# Altium PCB S36.pcbdoc
Units mm, origin at the board's own origin, x right, y up, seen from the top; angles counter-clockwise.
Board outline 99.01 x 72.4 mm, 2 copper layers (Top Layer, Bottom Layer); 7 components, 0 nets, 30 pads, 0 vias.
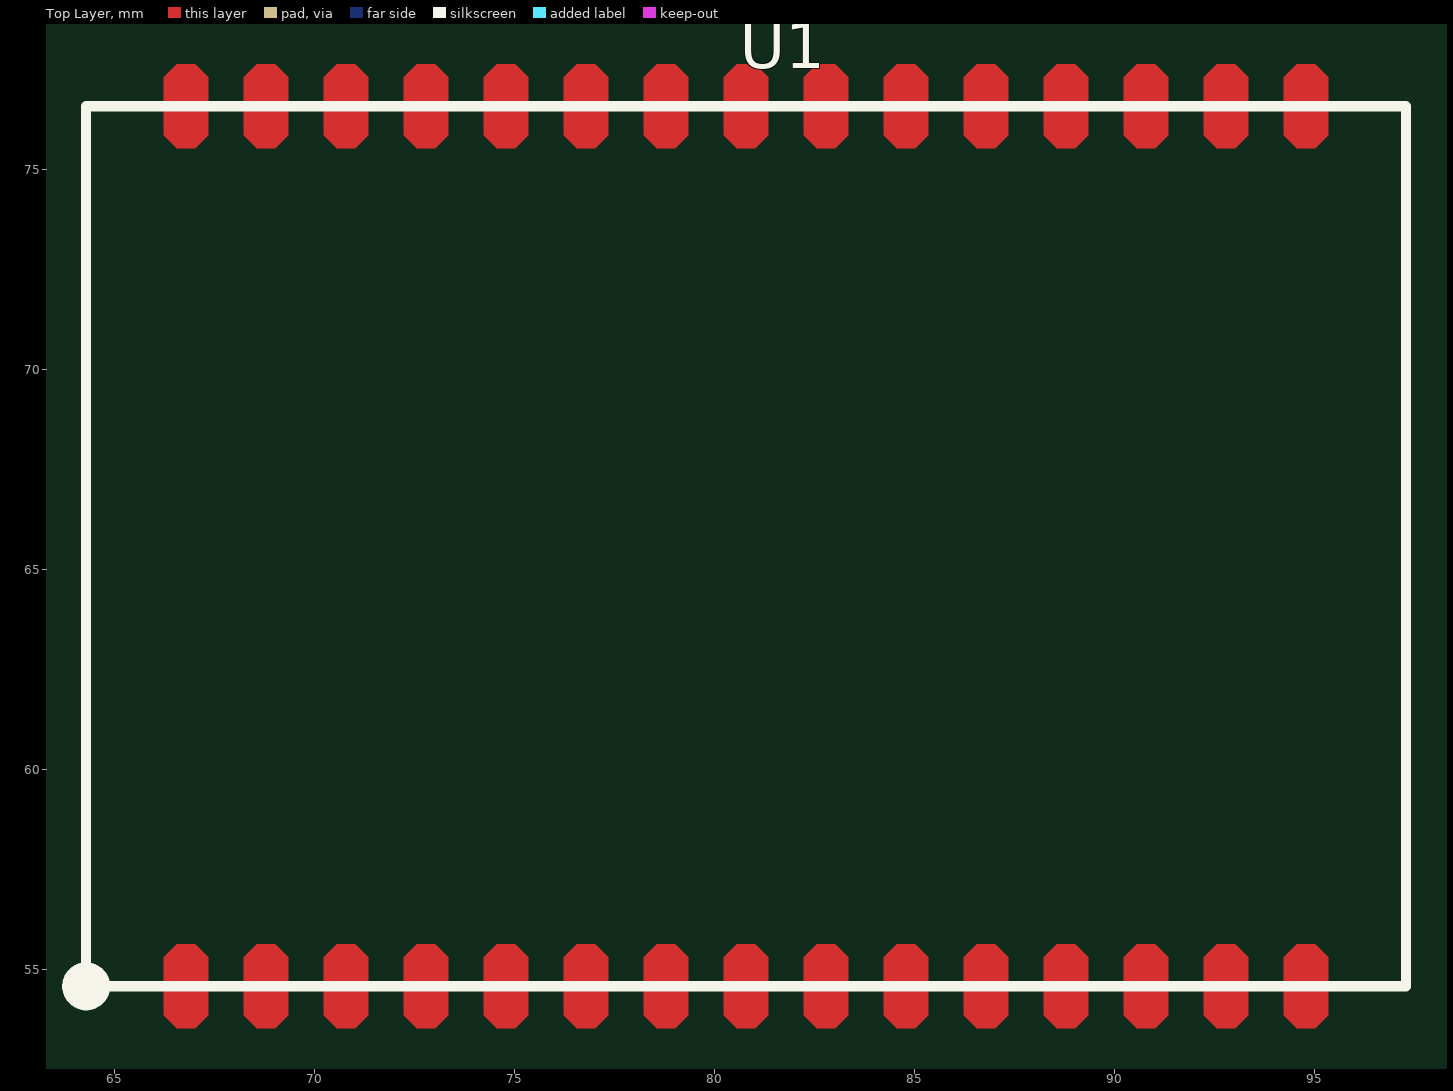
[diagram p0: Top Layer view]
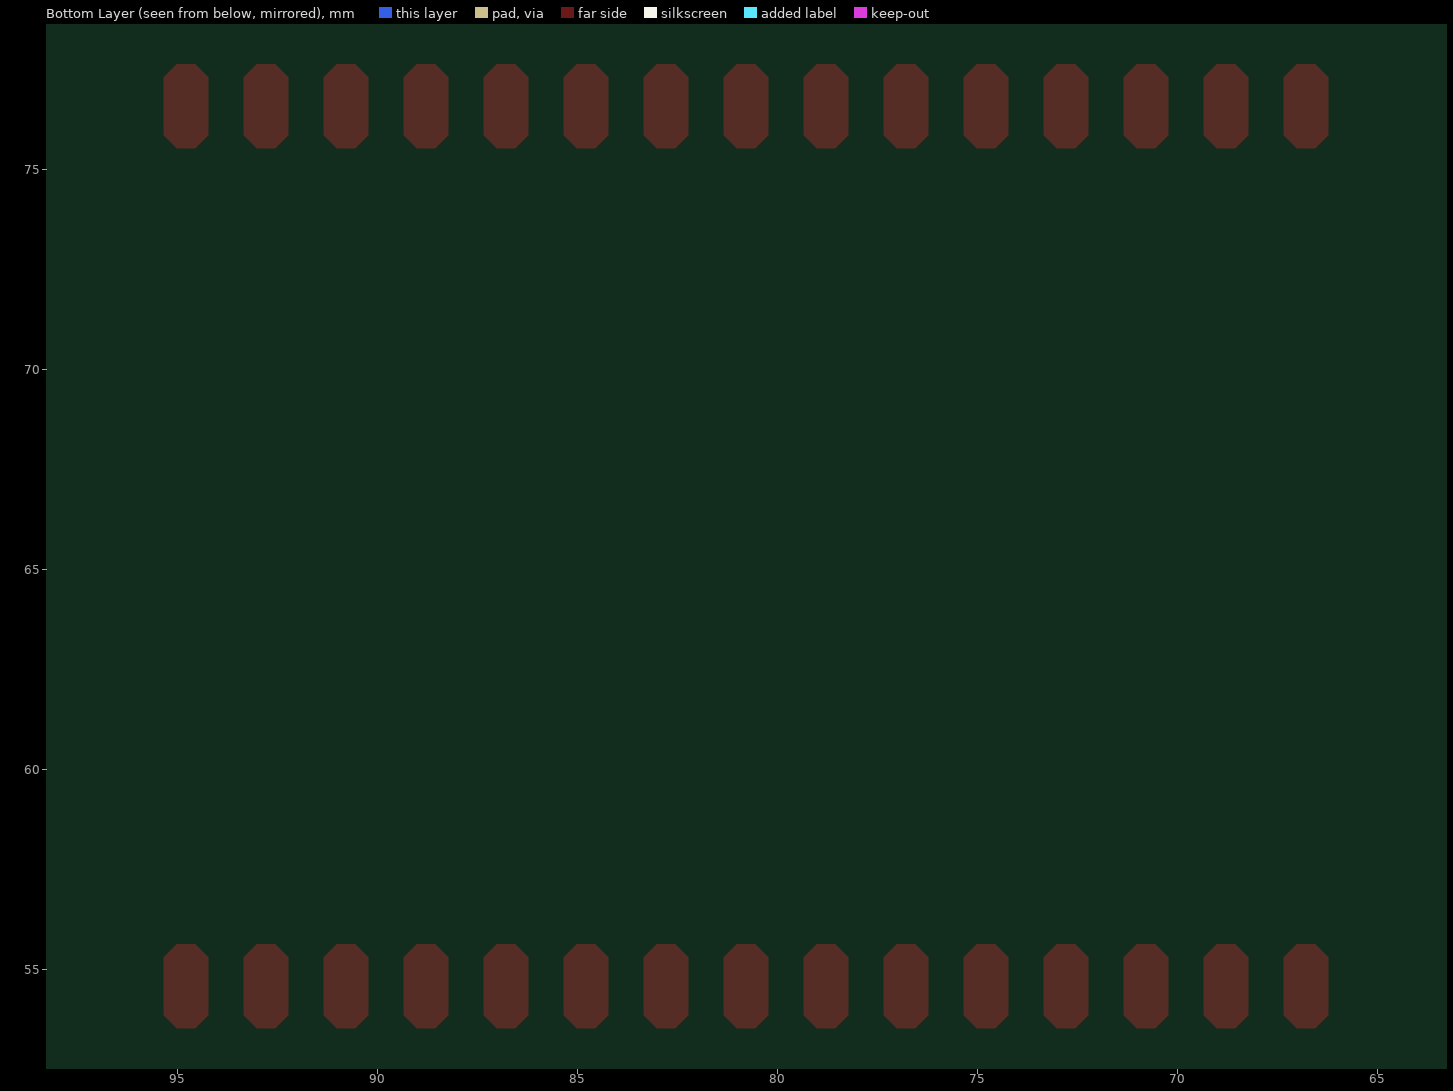
[diagram p1: Bottom Layer view, seen from below]

## Layer stack, top to bottom
Top Layer: signal copper (thickness not stored)
Dielectric: dielectric 0.32, FR-4, Dk 4.8
Bottom Layer: signal copper (thickness not stored)

## Board outline
124.406,25.4 25.4,25.4 25.4,97.798 124.406,97.798

## Components (designator, comment, footprint, x,y, rotation, side; value= is the part's Value field where it differs from the comment)
U1 "S36-PAD" S36-PAD 80.79,65.588 r0 top
? "" ? 79.29,78.868 r0 top
? "" ? 59.495,65.588 r0 top
? "" ? 92.59,49.419 r0 top
? "" ? 98.797,58.387 r0 top
? "" ? 103.373,74.813 r0 top
? "" ? 50.721,56.362 r0 top

## Footprints (in the part's own frame and the unit in brackets; to place one, negate y for a bottom-side part, rotate by r counter-clockwise, add the part's x,y. Pads: shape width x height; smd on the part's side, far side on the other; paste and mask are expansions set on the pad)
S36-PAD [mm]
  round 0 smd: 1(-14,-11) 2(-12,-11) 3(-10,-11) 4(-8,-11) 5(-6,-11) 6(-4,-11) 7(-2,-11) 8(0,-11) 9(2,-11) 10(4,-11) 11(6,-11) 12(8,-11) 13(10,-11) 14(12,-11) 15(14,-11) 16(14,11) 17(12,11) 18(10,11) 19(8,11) 20(6,11) 21(4,11) 22(2,11) 23(0,11) 24(-2,11) 25(-4,11) 26(-6,11) 27(-8,11) 28(-10,11) 29(-12,11) 30(-14,11)
  Top Layer region: 14.554,-11.73 14.229,-12.054 13.77,-12.054 13.446,-11.73 13.446,-10.27 13.77,-9.946 14.229,-9.946 14.554,-10.27
  Top Layer region: 12.554,-11.73 12.229,-12.054 11.77,-12.054 11.446,-11.73 11.446,-10.27 11.77,-9.946 12.229,-9.946 12.554,-10.27
  Top Layer region: 10.554,-11.73 10.229,-12.054 9.77,-12.054 9.446,-11.73 9.446,-10.27 9.77,-9.946 10.229,-9.946 10.554,-10.27
  Top Layer region: 8.554,-11.73 8.229,-12.054 7.77,-12.054 7.446,-11.73 7.446,-10.27 7.77,-9.946 8.229,-9.946 8.554,-10.27
  Top Layer region: 6.554,-11.73 6.23,-12.054 5.77,-12.054 5.446,-11.73 5.446,-10.27 5.77,-9.946 6.23,-9.946 6.554,-10.27
  Top Layer region: 4.554,-11.73 4.23,-12.054 3.77,-12.054 3.446,-11.73 3.446,-10.27 3.77,-9.946 4.23,-9.946 4.554,-10.27
  Top Layer region: 2.554,-11.73 2.229,-12.054 1.77,-12.054 1.446,-11.73 1.446,-10.27 1.77,-9.946 2.229,-9.946 2.554,-10.27
  Top Layer region: 0.554,-11.73 0.229,-12.054 -0.23,-12.054 -0.554,-11.73 -0.554,-10.27 -0.23,-9.946 0.229,-9.946 0.554,-10.27
  Top Layer region: -1.446,-11.73 -1.771,-12.054 -2.23,-12.054 -2.554,-11.73 -2.554,-10.27 -2.23,-9.946 -1.771,-9.946 -1.446,-10.27
  Top Layer region: -3.446,-11.73 -3.771,-12.054 -4.23,-12.054 -4.554,-11.73 -4.554,-10.27 -4.23,-9.946 -3.771,-9.946 -3.446,-10.27
  Top Layer region: -5.446,-11.73 -5.77,-12.054 -6.23,-12.054 -6.554,-11.73 -6.554,-10.27 -6.23,-9.946 -5.77,-9.946 -5.446,-10.27
  Top Layer region: -7.446,-11.73 -7.77,-12.054 -8.23,-12.054 -8.554,-11.73 -8.554,-10.27 -8.23,-9.946 -7.77,-9.946 -7.446,-10.27
  Top Layer region: -9.446,-11.73 -9.77,-12.054 -10.23,-12.054 -10.554,-11.73 -10.554,-10.27 -10.23,-9.946 -9.77,-9.946 -9.446,-10.27
  Top Layer region: -11.446,-11.73 -11.771,-12.054 -12.23,-12.054 -12.554,-11.73 -12.554,-10.27 -12.23,-9.946 -11.771,-9.946 -11.446,-10.27
  Top Layer region: -13.446,-11.73 -13.771,-12.054 -14.23,-12.054 -14.554,-11.73 -14.554,-10.27 -14.23,-9.946 -13.771,-9.946 -13.446,-10.27
  Top Layer region: 14.554,10.27 14.229,9.946 13.77,9.946 13.446,10.27 13.446,11.73 13.77,12.054 14.229,12.054 14.554,11.73
  Top Layer region: 12.554,10.27 12.229,9.946 11.77,9.946 11.446,10.27 11.446,11.73 11.77,12.054 12.229,12.054 12.554,11.73
  Top Layer region: 10.554,10.27 10.229,9.946 9.77,9.946 9.446,10.27 9.446,11.73 9.77,12.054 10.229,12.054 10.554,11.73
  Top Layer region: 8.554,10.27 8.229,9.946 7.77,9.946 7.446,10.27 7.446,11.73 7.77,12.054 8.229,12.054 8.554,11.73
  Top Layer region: 6.554,10.27 6.23,9.946 5.77,9.946 5.446,10.27 5.446,11.73 5.77,12.054 6.23,12.054 6.554,11.73
  Top Layer region: 4.554,10.27 4.23,9.946 3.77,9.946 3.446,10.27 3.446,11.73 3.77,12.054 4.23,12.054 4.554,11.73
  Top Layer region: 2.554,10.27 2.23,9.946 1.77,9.946 1.446,10.27 1.446,11.73 1.77,12.054 2.23,12.054 2.554,11.73
  Top Layer region: 0.554,10.27 0.229,9.946 -0.23,9.946 -0.554,10.27 -0.554,11.73 -0.23,12.054 0.229,12.054 0.554,11.73
  Top Layer region: -1.446,10.27 -1.771,9.946 -2.23,9.946 -2.554,10.27 -2.554,11.73 -2.23,12.054 -1.771,12.054 -1.446,11.73
  Top Layer region: -3.446,10.27 -3.771,9.946 -4.23,9.946 -4.554,10.27 -4.554,11.73 -4.23,12.054 -3.771,12.054 -3.446,11.73
  Top Layer region: -5.446,10.27 -5.77,9.946 -6.23,9.946 -6.554,10.27 -6.554,11.73 -6.23,12.054 -5.77,12.054 -5.446,11.73
  Top Layer region: -7.446,10.27 -7.77,9.946 -8.23,9.946 -8.554,10.27 -8.554,11.73 -8.23,12.054 -7.77,12.054 -7.446,11.73
  Top Layer region: -9.446,10.27 -9.77,9.946 -10.23,9.946 -10.554,10.27 -10.554,11.73 -10.23,12.054 -9.77,12.054 -9.446,11.73
  Top Layer region: -11.446,10.27 -11.771,9.946 -12.23,9.946 -12.554,10.27 -12.554,11.73 -12.23,12.054 -11.771,12.054 -11.446,11.73
  Top Layer region: -13.446,10.27 -13.771,9.946 -14.23,9.946 -14.554,10.27 -14.554,11.73 -14.23,12.054 -13.771,12.054 -13.446,11.73
  silkscreen extent -16.8,-11.3 16.5,11
? [mm]

## Nets (pads, with @x,y where several pads share a name; then routed paths per layer and width w, separated by ;. In a path a pad name is that pad's centre, name@x,y a point inside that pad or via, vN(x,y) a via of type N, cw(c..) or ccw(c..) an arc to the next point about the centre after c; other vN are vias at no path point)
pads on no net: U1.1 U1.2 U1.3 U1.4 U1.5 U1.6 U1.7 U1.8 U1.9 U1.10 U1.11 U1.12 U1.13 U1.14 U1.15 U1.16 U1.17 U1.18 U1.19 U1.20 U1.21 U1.22 U1.23 U1.24 U1.25 U1.26 U1.27 U1.28 U1.29 U1.30